# Altium PCB I-RING V1.0.pcbdoc
Units mil, origin at the board's own origin, x right, y up, seen from the top; angles counter-clockwise.
Board outline 1170.48 x 1480.27 mil, 2 copper layers (Top Layer, Bottom Layer); 42 components, 29 nets, 171 pads, 60 vias.
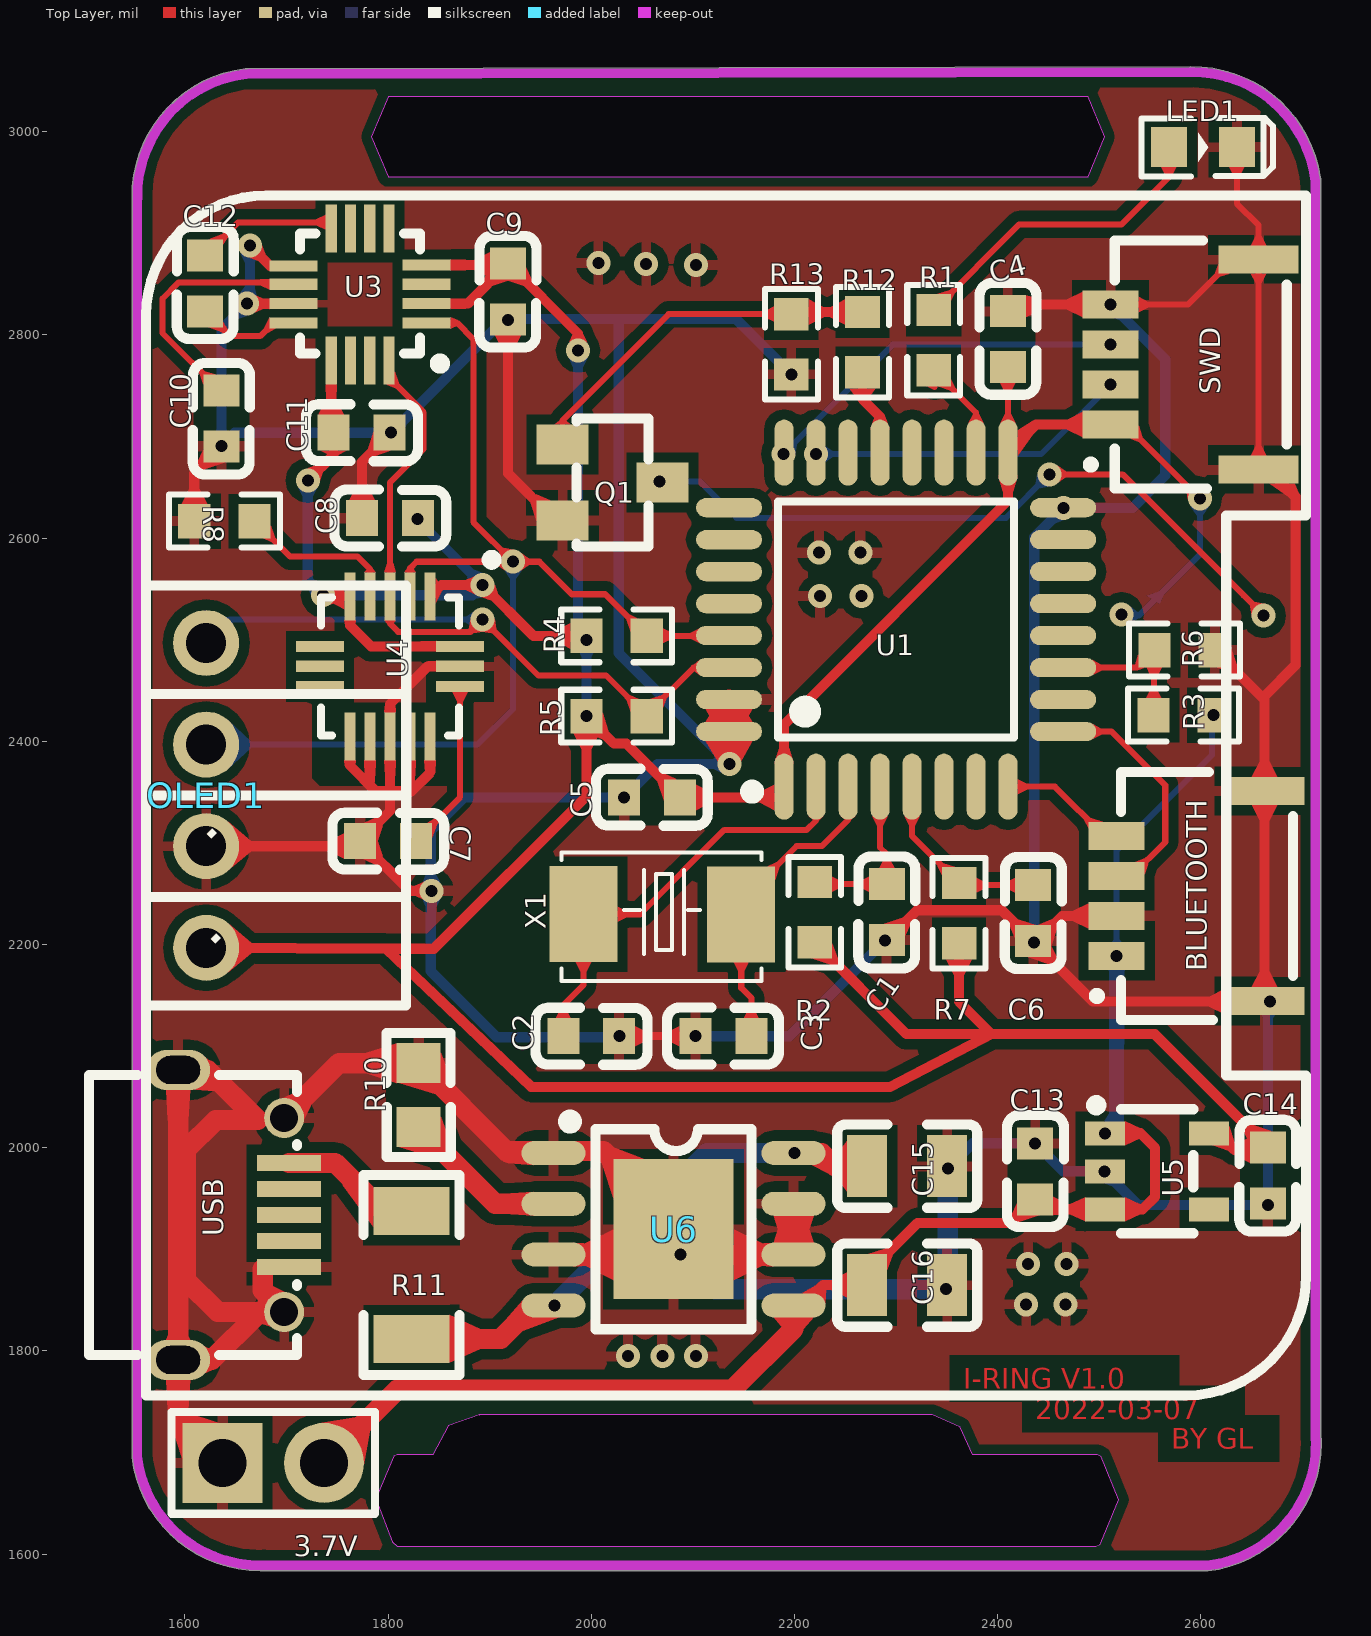
[diagram p0: Top Layer view]
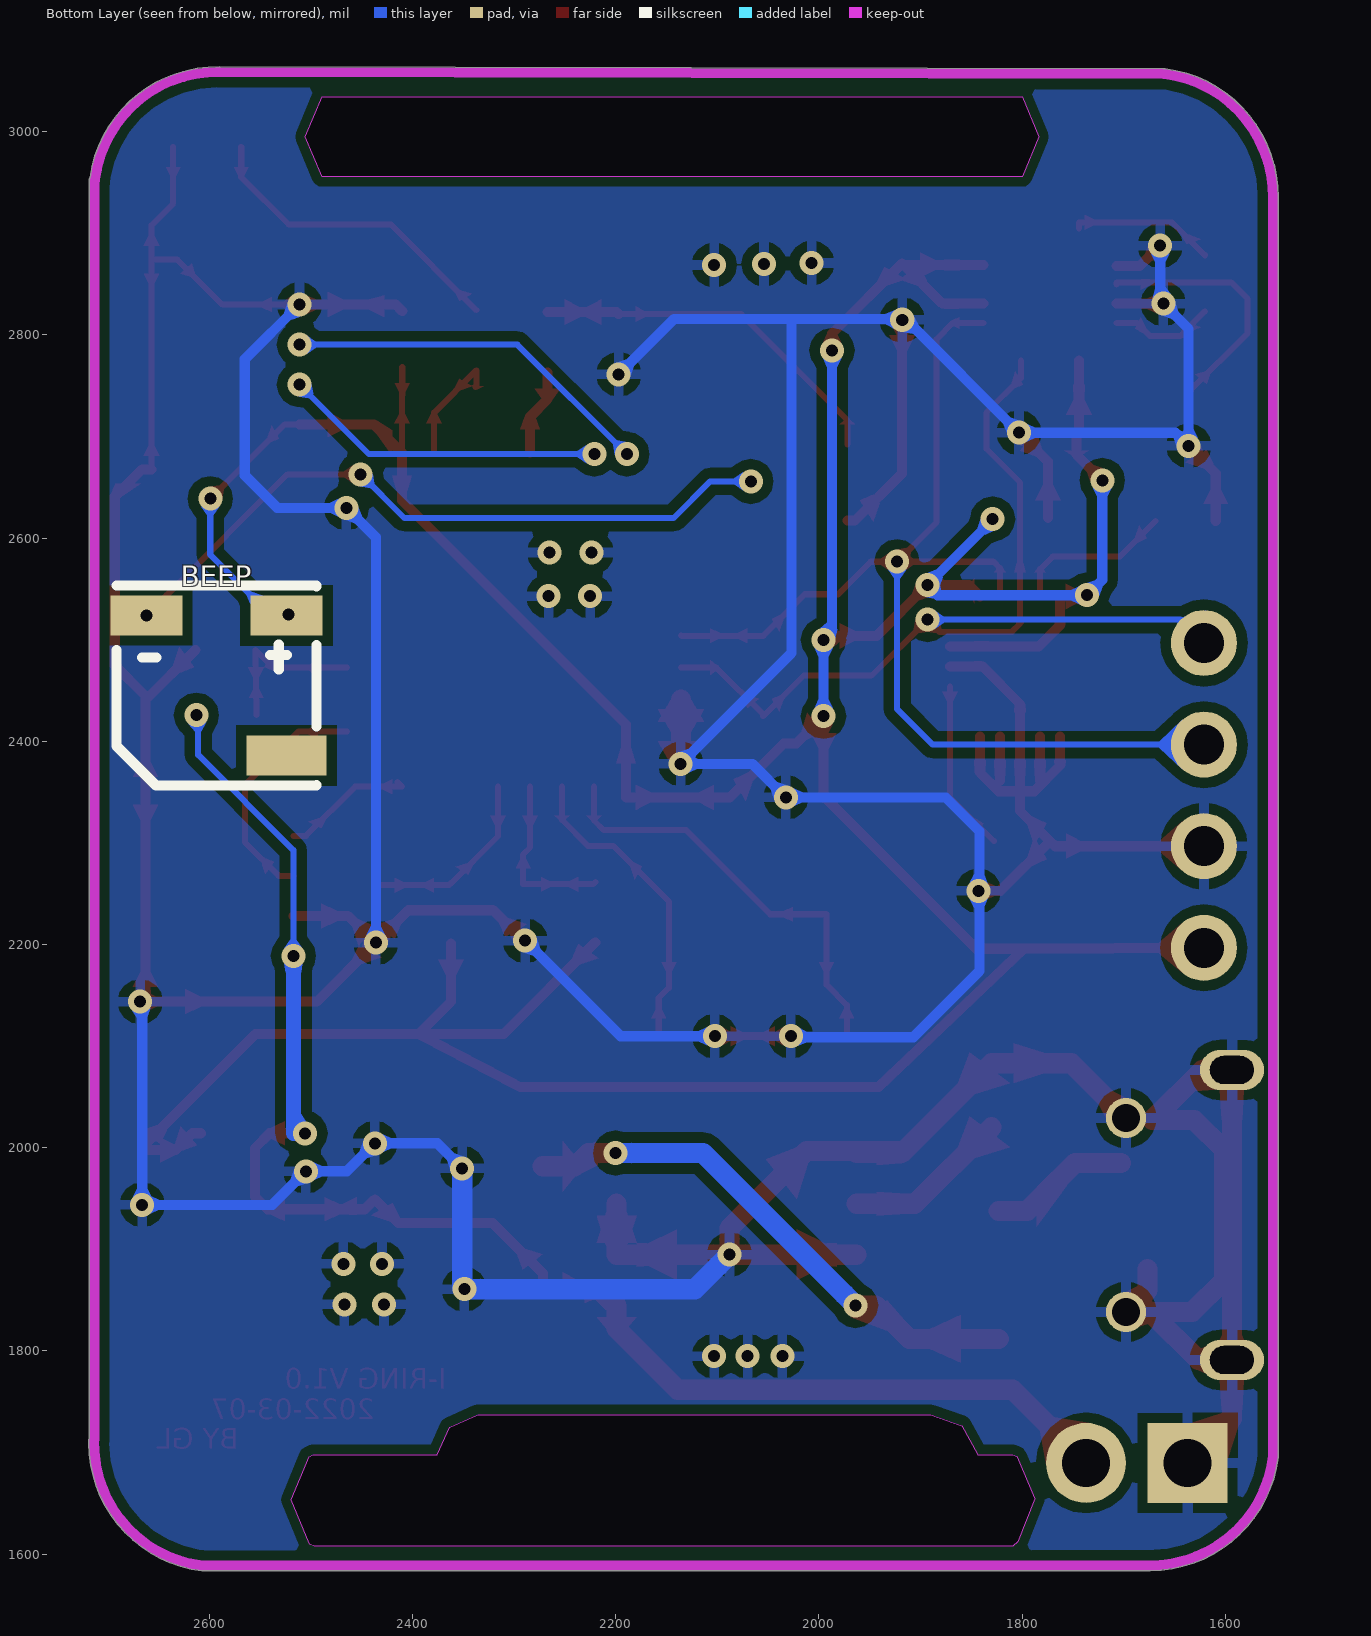
[diagram p1: Bottom Layer view, seen from below]

## Layer stack, top to bottom
Top Solder: solder mask 0.4, Solder Resist, Dk 3.5
Top Layer: signal copper 1.4
Dielectric1: dielectric 12.6, FR-4, Dk 4.8
Bottom Layer: signal copper 1.4
Bottom Solder: solder mask 0.4, Solder Resist, Dk 3.5

## Board outline
1548,1695.23 ccw(c1673.54,1710.36) 1674.02,1583.91 ccw(c1674.97,1588.83) 1674.97,1583.82 2606.52,1583.59 ccw(c2606.52,1588.6) 2606.52,1583.59 ccw(c2606.52,1588.6) 2607.12,1583.62 ccw(c2591.99,1709.17) 2718.44,1709.17 ccw(c2591.99,1709.17) 2718.39,1712.78 ccw(c2713.38,1712.64) 2717.99,1714.61 2717.99,2952.63 ccw(c2712.97,2952.63) 2717.33,2955.12 ccw(c2592.12,2937.42) 2590.16,3063.86 ccw(c2590.24,3058.85) 2590.02,3063.86 1661.2,3061.85 ccw(c1659.94,3056.99) 1659.34,3061.97 ccw(c1674.47,2936.43) 1548.02,2935.62 ccw(c1552.97,2934.83) 1547.96,2934.83 1547.96,1695.83 ccw(c1552.97,1695.83)
cut-out: 1804.03,1611.99 1808.97,1607.82 2496.69,1607.82 2500.81,1609.97 2501.49,1610.55 2519.27,1653.46 2501.76,1696.12 2497.95,1697.87 2375.53,1697.87 2363.12,1725.05 2335.84,1737.23 2335.1,1737.22 1889.98,1737.22 1890.05,1737.22 1859.32,1726.38 1843.72,1697.85 1808.97,1697.85 1805.43,1696.38 1787.66,1654.47
cut-out: 1799.97,2955.83 2488.95,2955.83 2505.26,2995.2 2488.95,3034.57 1799.97,3034.57 1783.67,2995.2

## Design rules (kind name [scope] priority, off if disabled: settings)
Clearance [All] p1: gap=10
PolygonConnect [All] p1: connectstyle=Relief reliefconductorwidth=10 reliefentries=4 polygonreliefangle="90 Angle" airgapwidth=10
RoutingVias [All] p1: holewidth=28 width=50 viastyle="Through Hole" minholewidth=28 minwidth=50 maxholewidth=28 maxwidth=50
SolderMaskExpansion [All] p1: expansion=4
Width [All] p1: maxlimit=10 minlimit=10 preferedwidth=10
30 further rules are at their usual default settings.

## Components (designator, comment, footprint, x,y, rotation, side; value= is the part's Value field where it differs from the comment)
3.7V "3.7V 400mAH" HDR-TH_2P-P2.54-V-M 1686.97,1689.83 r0 top
BEEP "FST-5020" BUZ-SMD_FST-5020 2592.97,2454.83 r180 bottom
BLUETOOTH "BLUETOOTH" CONN-SMD_SH1.0X4 2589.97,2247.84 r90 top
C1 "104" C0603 2290.97,2231.83 r90 top
C2 "20pF" C0603 1999.97,2109.83 r180 top
C3 "20pF" C0603 2129.97,2109.83 r0 top
C4 "104" C0603 2409.97,2795.83 r270 top
C5 "104" C0603 2059.97,2344.83 r0 top
C6 "104" C0603 2434.97,2230.83 r270 top
C7 "104" C0603 1799.97,2301.83 r180 top
C8 "104" C0603 1801.97,2619.83 r180 top
C9 "0.1u" C0603 1917.97,2842.83 r90 top
C10 "4.7uF" C0603 1635.97,2717.83 r90 top
C11 "104" C0603 1773.97,2703.83 r180 top
C12 "0.22uF" C0603 1619.97,2850.83 r270 top
C13 "104" C0603 2436.97,1976.83 r270 top
C14 "104" C0603 2665.97,1972.83 r90 top
C15 "10uF" C0805 2310.97,1981.83 r0 top
C16 "10uF" C0805 2310.97,1864.83 r0 top
LED1 "LED-0603_B" LED0603_BLUE 2601.97,2984.83 r0 top
OLED1 "0.96OLED_4P_MODULE_JX" 0.96OLED_4P 1620.97,2346.83 r90 top
Q1 "j3y" J3Y 2020.97,2654.83 r180 top
R1 "4.7K" R0603#1 2336.97,2794.83 r270 top
R2 "10K" R0603#1 2219.97,2231.83 r270 top
R3 "10K" R0603#1 2582.97,2425.83 r0 top
R4 "4.7K" R0603#1 2024.97,2503.83 r0 top
R5 "4.7K" R0603#1 2024.97,2424.83 r0 top
R6 "10K" R0603#1 2583.97,2489.83 r180 top
R7 "0" R0603#1 2361.97,2230.83 r270 top
R8 "4.7k" R0603#1 1638.97,2616.83 r180 top
R10 "4.7K" R0603#2 1829.97,2051.83 r270 top
R11 "0.25" R1206 1822.97,1874.83 r270 top
R12 "4.7k" R0603#1 2266.97,2792.83 r270 top
R13 "4.7k" R0603#1 2196.97,2790.83 r270 top
SWD "SWD" CONN-SMD_SH1.0X4 2583.97,2770.84 r90 top
U1 "STM32F030K6T6TR" LQFP-32_L7.0-W7.0-P0.80-LS9.0-TL 2299.97,2519.83 r90 top
U3 "C-HMC5883L" HMC 1770.97,2841.83 r180 top
U4 "ICM-20602" LGA-16_L3.0-W3.0-ICM20602 1801.97,2473.83 r180 top
U5 "RT9013-33GB" SOT-23-5_L3.0-W1.7-P0.95-LS2.8-BR 2556.99,1976.82 r180 top
U6 "TP4056X" SOP-8_L4.9-W3.9-P1.27-LS6.0-BL-EP 2080.97,1919.83 r270 top
USB "MICRO XNJ ZB" MICRO-USB-SMD_MICRO-XNJ-ZB 1647.97,1933.83 r90 top
X1 "8MHz" SMD-5032_2P 2069.97,2229.83 r0 top

## Footprints (in the part's own frame and the unit in brackets; to place one, negate y for a bottom-side part, rotate by r counter-clockwise, add the part's x,y. Pads: shape width x height; smd on the part's side, far side on the other; paste and mask are expansions set on the pad)
0.96OLED_4P [mm]
  round 1.65 hole 1: 1(-3.81,-0.001) 2(-1.27,0.002) 3(1.27,0.002) 4(3.81,0.002)
  silkscreen extent -15,-27.5 15,1.5
BUZ-SMD_FST-5020 [mm]
  rect 1.8x1 smd: 1(1.75,1.75) 2(-1.75,1.75)
  rect 2x1 smd: 3(1.75,-1.75)
  silkscreen extent -2.5,-2.5 2.5,2.5
C0603 [mm]
  rect 0.8x0.9 smd: 1(-0.7,0) 2(0.7,0)
  silkscreen extent -1.41,-0.71 1.39,0.72
C0805 [mm]
  rect 1x1.55 smd: 1(-1,0) 2(1,0)
  silkscreen extent -1.75,-1.04 1.75,1.04
CONN-SMD_SH1.0X4 [mm]
  rect 0.7x1.4 smd: 1(-1.5,1.85) 2(-0.5,1.85) 3(0.5,1.85) 4(1.5,1.85)
  rect 0.7x2 smd: 5(-2.625,-1.85) 6(2.625,-1.85)
  silkscreen extent -3.1,-2.55 3.1,2.42
HDR-TH_2P-P2.54-V-M [mm]
  rect 2x2 hole 1.2: 1(-1.27,0)
  round 2 hole 1.2: 2(1.27,0)
  silkscreen extent -2.54,-1.27 2.54,1.27
HMC [mm]
  rect 1.2x0.28 smd: 1(-1.702,0.762) 2(-1.702,0.279) 3(-1.702,-0.203) 4(-1.702,-0.686) 9(1.626,-0.66) 10(1.626,-0.203) 11(1.626,0.279) 12(1.626,0.762)
  rect 0.28x1.2 smd: 5(-0.762,-1.6) 6(-0.279,-1.6) 7(0.203,-1.6) 8(0.686,-1.6) 13(0.686,1.702) 14(0.203,1.702) 15(-0.279,1.702) 16(-0.762,1.702)
  silkscreen extent -2.16,-1.47 1.47,1.9
J3Y [mm]
  rect 1.3x1 smd: 1(1.25,-0.95) 2(1.25,0.95) 3(-1.25,0)
  silkscreen extent -0.9,-1.6 0.9,1.6
LED0603_BLUE [mm]
  rect 0.9x1 smd: 1(-0.85,0) 2(0.85,0)
  silkscreen extent -1.54,-0.73 1.75,0.73
LGA-16_L3.0-W3.0-ICM20602 [mm]
  rect 0.28x1.2 smd: 1(-1,-1.75) 2(-0.5,-1.75) 3(0,-1.75) 4(0.5,-1.75) 5(1,-1.75) 9(1,1.75) 10(0.5,1.75) 11(0,1.75) 12(-0.5,1.75) 13(-1,1.75)
  rect 1.2x0.28 smd: 6(1.75,-0.5) 7(1.75,0) 8(1.75,0.5) 14(-1.75,0.5) 15(-1.75,0) 16(-1.75,-0.5)
  silkscreen extent -2.66,-2.79 1.73,1.73
LQFP-32_L7.0-W7.0-P0.80-LS9.0-TL [mm]
  oval 1.65x0.48 smd: 1(-4.176,2.799) 2(-4.176,2) 3(-4.176,1.2) 4(-4.176,0.4) 5(-4.176,-0.4) 6(-4.176,-1.2) 7(-4.176,-2) 8(-4.176,-2.799) 17(4.176,-2.799) 18(4.176,-2) 19(4.176,-1.2) 20(4.176,-0.4) 21(4.176,0.4) 22(4.176,1.2) 23(4.176,2) 24(4.176,2.799)
  oval 0.48x1.65 smd: 9(-2.799,-4.176) 10(-2,-4.176) 11(-1.2,-4.176) 12(-0.4,-4.176) 13(0.4,-4.176) 14(1.2,-4.176) 15(2,-4.176) 16(2.799,-4.176) 25(2.799,4.176) 26(1.999,4.176) 27(1.199,4.176) 28(0.399,4.176) 29(-0.399,4.176) 30(-1.199,4.176) 31(-1.999,4.176) 32(-2.799,4.176)
  silkscreen extent -4.45,-2.95 2.95,3.75
MICRO-USB-SMD_MICRO-XNJ-ZB [mm]
  rect 0.4x1.6 smd: 1(1.3,-1.388) 2(0.65,-1.388) 3(0,-1.388) 4(-0.65,-1.388) 5(-1.3,-1.388)
  oval 1x1.6 hole 0.7 slot 1.1 at 90 deg: 6(-3.625,1.388) 6(3.625,1.388)
  round 1 hole 0.7: 6(-2.425,-1.262) 6(2.425,-1.262)
  silkscreen extent -3.5,-1.59 3.5,3.62
R0603#1 [mil]
  rect 31.75x34.02 smd: 1(-29.66,0) 2(29.65,0)
  silkscreen extent -55,-26 55,26
R0603#2 [mil]
  rect 39.37x43.31 smd: 1(-31.49,0) 2(31.49,0)
  silkscreen extent -61,-31 61,32
R1206 [mm]
  rect 1.2x1.9 smd: 1(-1.6,0) 2(1.6,0)
  silkscreen extent -2.5,-1.2 2.5,1.2
SMD-5032_2P [mm]
  rect 1.7x2.4 smd: 1(-1.971,0) 2(1.971,0)
  silkscreen extent -2.52,-1.67 2.48,1.55
SOP-8_L4.9-W3.9-P1.27-LS6.0-BL-EP [mm]
  oval 0.6x1.6 smd: 1(-1.905,-3) 2(-0.635,-3) 3(0.635,-3) 4(1.905,-3) 5(1.905,3) 6(0.635,3) 7(-0.635,3) 8(-1.905,3)
  rect 3.5x3 smd: 9(0,0)
  silkscreen extent -2.84,-2.74 2.5,1.95
SOT-23-5_L3.0-W1.7-P0.95-LS2.8-BR [mm]
  rect 1x0.6 smd: 1(1.3,-0.95) 2(1.3,0) 3(1.3,0.95) 4(-1.3,0.95) 5(-1.3,-0.95)
  silkscreen extent -0.9,-1.78 1.65,1.55

## Via types
v1: diameter 23.62, hole 11.81, Top Layer to Bottom Layer, 58 vias
v2: diameter 24, hole 12, Top Layer to Bottom Layer, 2 vias

## Nets (pads, with @x,y where several pads share a name; then routed paths per layer and width w, separated by ;. In a path a pad name is that pad's centre, name@x,y a point inside that pad or via, vN(x,y) a via of type N, cw(c..) or ccw(c..) an arc to the next point about the centre after c; other vN are vias at no path point)
+3.3V: BEEP.1 C4.2 C5.2 C8.1 C9.2 C11.2 C14.2 OLED1.1 R2.2 R4.1 R5.1 R7.2 SWD.1 U1.1 U1.17 U3.2 U3.4 U3.13 U4.1 U4.5 U4.16 U5.5 | length 4511.4
  Top Layer w6: C4.2@2409.97,2768.23 2409.97,2741.03 2410.17,2740.83 U1.17 ; SWD.1@2511.17,2711.83 2526.07,2711.83 v1(2598.97,2638.83)
  Top Layer w10: OLED1.1@1621.07,2196.83 1797.97,2195.83 ; v1(1720.97,2656.83) 1746.37,2682.23 C11.2 1743.97,2706.23 U3.13 ; v1(1735.97,2543.83) 1737.07,2542.73 U4.5 1762.57,2514.23 1783.27,2493.53 U4.16 ; U3.2 1878.37,2830.83 C9.2 ; U3.4 1916.37,2868.83 C9.2 ; U4.1@1841.37,2542.73 1852.47,2553.83 v1(1892.97,2553.83) 1942.97,2503.83 R4.1 ; v1(1986.97,2784.83) 1986.97,2801.43 C9.2 ; R2.2@2219.97,2202.13 2310.27,2111.83 2393.97,2111.83 ; R7.2@2361.97,2201.13 2361.97,2143.83 2393.97,2111.83 ; SWD.1@2511.17,2711.73 2437.67,2711.73 U1.17 2410.17,2637.03 2189.77,2416.63 U1.1 2189.77,2344.83 2087.57,2344.83 2034.57,2397.83 2022.27,2397.83 v1(1995.31,2424.83) 1995.27,2346.13 1844.97,2195.83 1797.97,2195.83 ; U5.5 2616.57,2014.23 2632.97,1997.83 2663.37,1997.83 C14.2 2554.57,2111.83 2393.97,2111.83 ; 1797.97,2195.83 1940.97,2059.83 2293.97,2059.83 2393.97,2111.83
  Bottom Layer w6: BEEP.1 2538.87,2523.73 2598.97,2583.83 v1(2598.97,2638.83)
  Bottom Layer w10: v1(1720.97,2656.83) 1720.97,2558.83 v1(1735.97,2543.83) ; v1(1735.97,2543.83) 1882.97,2543.83 v1(1892.97,2553.83) 1828.97,2617.83 v1(1828.97,2618.83) ; v1(1986.97,2784.83) 1986.97,2508.17 v1(1995.31,2499.83) v1(1995.31,2424.83)
  other v1: 2521.97,2524.83
+5V: R11.1 USB.1 | length 140
  Top Layer w20: USB.1 1747.77,1985.03 1794.97,1937.83 R11.1
ADC_IN: R3.1 R6.2 U1.11 | length 161
  Top Layer w6: U1.11 2537.07,2472.63 R6.2 R3.1@2553.37,2425.83
BEEP: R12.2 U1.21 | length 86
  Top Layer w10: R12.2@2266.97,2763.13 2266.97,2736.83 2284.17,2719.63 U1.21
C7_1: C7.1 U4.14 | length 170.2
  Top Layer w6: C7.1@1827.57,2301.83 1870.87,2345.13 U4.14
C10_2: C10.2 U3.10 | length 253
  Top Layer w6: C10.2 1634.37,2745.43 1577.97,2801.83 1577.97,2835.83 1593.97,2851.83 1706.97,2851.83 U3.10
C12_1: C12.1 U3.8 | length 143.4
  Top Layer w6: C12.1 1652.37,2910.83 1743.97,2910.83 U3.8
C12_2: C12.2 U3.12 | length 118.6
  Top Layer w6: C12.2@1631.37,2811.83 1619.97,2823.23 1644.37,2798.83 1673.97,2798.83 1686.97,2811.83 U3.12
FOSC1: C2.2 U1.2 X1.1 | length 428.7
  Top Layer w6: C2.2 1972.37,2140.23 1992.37,2160.23 X1.1 2047.97,2229.83 2130.97,2312.83 2211.97,2312.83 2221.27,2322.13 U1.2@2221.27,2355.43
FOSC2: C3.2 U1.3 X1.2 | length 308
  Top Layer w6: C3.2@2157.57,2109.83 2157.57,2147.43 2147.57,2157.33 X1.2 2147.57,2242.43 2201.97,2296.83 2226.97,2296.83 2252.77,2322.63 U1.3@2252.77,2355.43
GND: 3.7V.1 BLUETOOTH.2 BLUETOOTH.5 BLUETOOTH.6 C1.1 C2.1 C3.1 C4.1 C5.1 C6.2 C7.2 C8.2 C9.1 C10.1 C11.1 C13.1 C14.1 C15.2 C16.2 LED1.2 OLED1.2 Q1.2 R6.1 R8.2 R10.1 R13.2 SWD.4 SWD.5 SWD.6 U1.16 U1.31 U1.32 U3.9 U3.11 U4.9 U4.10 U4.11 U4.12 U4.13 U4.15 U5.2 U6.1 U6.3 U6.6 U6.7 U6.9 USB.5 USB.6 | length 8878.6
  Top Layer w6: v1(2511.17,2829.93) 2587.07,2829.93 2631.37,2874.23 SWD.6 ; LED1.2@2635.47,2984.83 2635.47,2929.33 2656.77,2908.03 SWD.6 ; SWD.5 SWD.6
  Top Layer w8: C2.1@2027.57,2109.83 v1(2102.41,2109.83)
  Top Layer w10: R8.2 1609.27,2663.63 C10.1@1635.97,2690.23 ; OLED1.2 1767.37,2296.83 C7.2 ; v1(1660.97,2830.83) U3.11 ; v1(1663.97,2887.83) 1683.97,2867.83 U3.9 ; U4.9 1762.57,2376.23 1787.97,2350.83 1822.97,2350.83 1841.37,2369.23 U4.13@1841.37,2404.93 ; C8.2 1774.37,2675.23 v1(1802.97,2703.83) ; 1782.27,2360.83 U4.10 ; 1821.67,2360.83 U4.12 ; v1(1842.97,2252.83) 1821.37,2252.83 C7.2 ; U4.15 1838.97,2473.83 1801.97,2436.83 U4.11 1801.97,2360.83 1801.97,2331.43 C7.2 ; C9.1@1917.97,2815.23 1917.97,2663.83 1964.37,2617.43 Q1.2 ; C1.1@2290.97,2204.23 2320.57,2233.83 2403.97,2233.83 v1(2435.97,2201.83) 2493.97,2143.83 v1(2667.97,2143.83) ; C4.1 2416.47,2829.93 v1(2511.17,2829.93) ; C6.2@2434.97,2203.23 2438.37,2203.23 2463.27,2228.13 BLUETOOTH.2@2517.17,2228.13 ; U1.16 2464.77,2630.03 v1(2464.97,2629.83) ; R6.1@2613.67,2489.83 2662.77,2440.63 ; SWD.5 2666.27,2667.53 2692.97,2640.83 2692.97,2474.83 2662.77,2444.63 2662.77,2440.63 ; BLUETOOTH.5 2662.77,2351.13 2662.77,2440.63
  Top Layer w20: 3.7V.1 1593.37,1733.43 USB.6@1593.37,1791.13 ; 1671.67,1836.33 1626.47,1791.13 USB.6@1593.37,1791.13 ; 1671.67,2027.33 1622.47,2076.53 1593.37,2076.53 1593.37,1815.13 USB.6@1593.37,1791.13 ; 1671.68,2027.3 1630.45,2027.3 1600.97,1997.83 1600.97,1869.83 1632.44,1838.36 1697.67,1838.36 1676.57,1859.43 USB.5@1676.57,1880.63 ; USB.6@1697.67,2029.33 1751.67,2083.33 R10.1 1918.47,1994.83 U6.1 ; 1918.87,1996.83 2011.97,1996.83 2087.97,1920.83 v1(2087.97,1894.83) ; U6.3 v1(2087.97,1894.83) ; U1.31 U1.32 v1(2135.97,2377.83) ; U6.7 U6.6 v1(2087.97,1894.83)
  Bottom Layer w10: v1(1663.97,2887.83) 1663.97,2833.83 v1(1660.97,2830.83) 1635.98,2805.83 v1(1635.97,2690.83) 1648.98,2703.83 v1(1802.97,2703.83) 1913.97,2814.83 v2(1917.97,2814.83) ; v2(1917.97,2814.83) 1918.97,2815.83 2027.97,2815.83 ; v1(2027.53,2109.83) 2026.53,2108.83 1906.98,2108.83 1841.98,2173.83 1841.98,2311.83 1874.97,2344.83 v1(2032.41,2344.83) 2065.41,2377.83 v1(2135.97,2377.83) 2026.97,2486.83 2026.97,2815.83 2027.97,2815.83 ; v1(2102.41,2109.83) 2194.97,2109.83 v1(2288.97,2203.83) ; v1(2196.97,2761.17) 2142.31,2815.83 2027.97,2815.83 ; v1(2350.97,1979.83) 2375.53,2004.39 v1(2436.97,2004.39) 2464.53,1976.83 v1(2504.97,1976.83) 2537.97,1943.83 v1(2665.97,1943.83) ; 2435.97,2250.83 v1(2435.97,2201.83) 2435.97,2600.83 v1(2464.97,2629.83) ; v1(2464.97,2629.83) 2532.97,2629.83 2564.97,2661.83 2564.97,2776.13 v1(2511.17,2829.93) ; v1(2665.97,1943.83) 2665.98,2141.83 v1(2667.97,2143.83)
  Bottom Layer w20: v1(2087.97,1894.83) 2121.97,1860.83 v1(2348.97,1860.83) 2350.98,1862.83 v1(2350.97,1979.83)
  other v1: 2035.97,1794.83 2069.97,1794.83 2102.97,1794.83 2427.97,1845.83 2466.97,1845.83 2429.97,1885.83 2467.97,1885.83 2224.97,2542.83 2265.97,2542.83 2223.97,2585.83 2264.97,2585.83 2102.97,2868.83 2053.97,2869.83 2006.97,2870.83
  other v2: 1917.97,2814.83
LED: R1.2 U1.18 | length 114.9
  Top Layer w6: 2337.97,2748.83 2336.97,2749.83 2336.97,2765.13 2378.67,2723.43 U1.18
LED1_1: LED1.1 R1.1 | length 315.2
  Top Layer w6: R1.1 2421.27,2908.83 2521.97,2908.83 2568.47,2955.33 LED1.1
NRST: C1.2 R2.1 U1.4 | length 170.7
  Top Layer w6: R2.1 2222.07,2259.43 C1.2 2290.97,2288.83 2284.17,2295.53 U1.4
NULL: 
Q1_1: Q1.1 R12.1 R13.1 | length 363.1
  Top Layer w6: Q1.1 1971.77,2715.93 2076.27,2820.53 R13.1
  Top Layer w10: R13.1 2198.97,2822.53 R12.1
Q1_3: BEEP.2 Q1.3 | length 698
  Top Layer w6: v1(2450.97,2662.83) 2522.97,2662.83 2641.97,2543.83 v1(2661.87,2523.73) 2655.77,2529.83 2652.97,2532.83
  Bottom Layer w6: v1(2066.97,2655.83) 2106.97,2655.83 2142.97,2619.83 2407.97,2619.83 v1(2450.97,2662.83)
RXD: BLUETOOTH.3 U1.9 | length 269.9
  Top Layer w6: U1.9@2494.17,2409.63 U1.9 2512.17,2409.63 2564.97,2356.83 2564.97,2300.83 2531.67,2267.53 BLUETOOTH.3@2517.17,2267.53
S$20193: 
SCL: OLED1.3 R4.2 U1.29 U3.1 U4.2 | length 1124
  Top Layer w6: U4.2 1821.67,2570.53 1827.97,2576.83 v1(1922.97,2576.83) ; U3.1 1867.97,2811.83 1883.97,2795.83 1883.97,2615.83 v1(1922.97,2576.83) ; U1.29 2135.27,2503.83 2054.67,2503.83 2013.67,2544.83 1980.97,2544.83 1948.97,2576.83 v1(1922.97,2576.83)
  Bottom Layer w6: OLED1.3 1887.97,2396.83 1922.97,2431.83 v1(1922.97,2576.83)
SDA: OLED1.4 R5.2 U1.30 U3.16 U4.3 | length 970.4
  Top Layer w6: U3.16 1800.97,2757.83 1834.97,2723.83 1834.97,2687.83 1801.97,2654.83 U4.3 1801.97,2515.83 1809.97,2507.83 1880.97,2507.83 v1(1892.97,2519.83) 1947.97,2464.83 2014.67,2464.83 2054.67,2424.83 2054.67,2426.53 2100.77,2472.63 U1.30
  Bottom Layer w6: OLED1.4 1643.92,2519.83 v1(1892.97,2519.83)
SWCLK: SWD.3 U1.24 | length 366.8
  Bottom Layer w6: v1(2188.97,2682.83) 2296.67,2790.53 v1(2511.14,2790.52)
SWDIO: SWD.2 U1.23 | length 318.5
  Bottom Layer w6: v1(2220.97,2682.83) 2442.81,2682.83 v1(2511.14,2751.15)
TXD: BLUETOOTH.4 U1.8 | length 133.3
  Top Layer w6: U1.8 2456.37,2355.43 2504.87,2306.93 BLUETOOTH.4@2517.17,2306.93 ; U1.8 U1.8@2414.58,2359.83
U1_5: C6.1 R7.1 U1.5 | length 187.9
  Top Layer w6: U1.5@2315.77,2355.43 2315.77,2306.73 R7.1 2364.07,2258.43 C6.1
U4_4: R8.1 U4.4 | length 160
  Top Layer w6: R8.1@1668.67,2616.83 1703.67,2581.83 1769.97,2581.83 1782.27,2569.53 U4.4
U6_2: R10.2 U6.2 | length 164.2
  Top Layer w20: R10.2 1905.47,1944.83 U6.2
U6_4: C15.1 R11.2 U6.4 U6.8 | length 528.7
  Top Layer w20: R11.2 1910.97,1811.83 1943.97,1844.83 U6.4 ; v1(2199.97,1994.83) 2226.97,1994.83 2239.97,1981.83 C15.1
  Bottom Layer w20: v1(1963.97,1844.83) 2113.97,1994.83 v1(2199.97,1994.83)
VBAT: 3.7V.2 BLUETOOTH.1 C13.2 C16.1 R3.2 U5.1 U5.3 U6.5 | length 1520.8
  Top Layer w10: U6.5 2207.97,1844.83 2227.97,1864.83 C16.1 2271.57,1876.43 2320.97,1925.83 2413.57,1925.83 2436.97,1949.23 2446.77,1939.43 U5.3 2542.57,1939.43 2554.97,1951.83 2554.97,1999.83 2540.57,2014.23 v1(2505.77,2014.23)
  Top Layer w20: 3.7V.2 1808.97,1761.83 2138.97,1761.83 2199.07,1821.93 U6.5
  Bottom Layer w6: v1(2517.14,2188.77) 2517.14,2292.99 2610.97,2386.83 2610.97,2419.83 v1@2615.97,2424.83
  Bottom Layer w15: v1(2505.77,2014.23) 2516.97,2014.23 v1(2517.14,2188.77)
  other v1: 2612.63,2425.83
pads on no net: BEEP.3 U1.6 U1.7 U1.10 U1.12 U1.13 U1.14 U1.15 U1.19 U1.20 U1.22 U1.25 U1.26 U1.27 U1.28 U3.3 U3.5 U3.6 U3.7 U3.14 U3.15 U4.6 U4.7 U4.8 U5.4 USB.2 USB.3 USB.4

## Polygon pours and split planes (outlines as drawn)
GND on Top Layer "Top Layer-No Net" (solid, remove dead copper, pour order 0): 1226.82,3099.74 1206.82,3079.74 1206.82,1559.74 2936.82,1559.74 3116.82,1379.74 3171.82,1434.74 3171.82,3109.74
GND on Bottom Layer "Top Layer-No Net" (solid, remove dead copper, pour order 2): 1110,3240 1110,1550 1090,1530 1150,1470 3035,1470 3035,3215 3015,3235

## Keep-outs
Keep-Out Layer:
  lines w10: 1552.97,1695.83 ccw(c1673.54,1710.36) 1675.42,1588.93 ; 1553.05,2934.54 cw(c1674.47,2936.43) 1659.94,3056.99 ; 2590.24,3058.85 cw(c2592.12,2937.42) 2712.69,2951.95 ; 2606.52,1588.6 ccw(c2591.99,1709.17) 2713.38,1712.64

## Other copper
Top Layer:
  pour cut-out: 1723.97,2436.83 1724.97,2435.83 1724.97,2363.83 1732.97,2355.83 1875.97,2355.83 1878.97,2358.83 1878.97,2436.83
  region net GND: 1642.41,2272.47 1642.41,2321.19 1665.14,2301.83 1665.14,2291.83
  region net +3.3V: 1642.65,2221.07 1642.37,2172.35 1665.22,2191.58 1665.27,2201.58
  region net GND: 1696.44,2048.95 1717.32,2028.07 1723.7,2041.18 1709.55,2055.32
  region net GND: 1684.65,1823.6 1684.65,1853.12 1670.88,1848.36 1670.88,1828.36
  region net GND: 1678.03,1837.13 1698.91,1858.01 1685.8,1864.38 1671.65,1850.24
  region net VBAT: 1734.51,1729.12 1776.26,1687.36 1781.94,1720.66 1767.8,1734.8
  region net SCL: 1930.79,2567.97 1930.79,2585.69 1939.05,2579.83 1939.05,2573.83
  region net SCL: 1915.16,2567.97 1915.16,2585.69 1906.89,2579.83 1906.89,2573.83
  region net SCL: 1923.71,2588.62 1911.19,2576.09 1909.48,2586.08 1913.72,2590.32
  region net SDA: 1904.76,2520.57 1892.23,2508.04 1902.22,2506.34 1906.46,2510.58
  region net SDA: 1893.71,2508.04 1881.19,2520.57 1879.48,2510.58 1883.73,2506.34
  region net U6_4: 1956.16,1835.97 1956.16,1853.69 1947.89,1854.83 1947.89,1834.83
  region net U6_4: 2207.79,1985.97 2207.79,2003.69 2216.05,2004.83 2216.05,1984.83
  region net VBAT: 2513.59,2005.37 2513.59,2023.09 2521.86,2019.23 2521.86,2009.23
  region net +3.3V: 1989.95,2510.35 1985.54,2493.19 1978.45,2498.83 1981.02,2508.83
  region net +3.3V: 2007.1,2425.55 1994.55,2413.04 2003.12,2409.91 2010.2,2416.97
  region net +3.3V: 2004.15,2417 1986.43,2417.04 1990.27,2408.76 2000.27,2408.74
  region net +3.3V: 1978.11,2792.64 1995.83,2792.64 1991.97,2800.91 1981.97,2800.91
  region net GND: 1668.79,2821.97 1668.79,2839.69 1677.06,2835.83 1677.06,2825.83
  region net GND: 1637.01,2679.06 1624.17,2691.28 1621.27,2682.63 1628.51,2675.73
  region net GND: 1803.71,2692.04 1791.19,2704.57 1788.07,2696 1795.14,2688.92
  region net GND: 1908.97,2806.89 1926.97,2806.89 1922.97,2798.49 1912.97,2798.49
  region net GND: 1908.97,2806.89 1926.97,2806.89 1922.97,2798.49 1912.97,2798.49
  region net GND: 2673.85,2154.07 2657.07,2148.38 2657.81,2157.36 2667.81,2160.75
  region net GND: 2660.16,2134.97 2660.16,2152.69 2651.89,2148.83 2651.89,2138.83
  region net GND: 2447.72,2200.57 2435.75,2213.64 2444.45,2216.38 2451.21,2209
  region net GND: 2436.72,2213.62 2424.19,2201.09 2421.07,2209.66 2428.14,2216.73
  region net GND: 2447.76,2202.57 2435.24,2190.04 2443.81,2186.92 2450.88,2193.99
  region net GND: 2300.68,2202.28 2289.05,2215.64 2297.81,2218.17 2304.39,2210.61
  region net GND: 2144.74,2385.75 2127.02,2385.53 2125.77,2393.78 2145.77,2394.03
  region net GND: 2094.6,2100.97 2094.6,2118.69 2086.34,2113.83 2086.34,2105.83
  region net GND: 2035.35,2100.97 2035.35,2118.69 2043.61,2113.83 2043.61,2105.83
  region net +3.3V: 1885.16,2544.97 1885.16,2562.69 1876.89,2558.83 1876.89,2548.83
  region net +3.3V: 1904.76,2554.57 1892.23,2542.04 1900.81,2538.93 1907.88,2546
  region net GND: 1835.16,2243.97 1835.16,2261.69 1826.89,2257.83 1826.89,2247.83
  region net +3.3V: 1744.38,2552.13 1743.16,2534.46 1751.68,2537.73 1752.36,2547.73
  region net GND: 1675.76,2888.57 1663.23,2876.04 1671.81,2872.92 1678.88,2880
  region net +3.3V: 1732.76,2656.09 1720.24,2668.62 1728.81,2671.74 1735.88,2664.66
  region net GND: 2503.36,2821.07 2503.36,2838.79 2495.1,2834.93 2495.1,2824.93
  region net GND: 2519.01,2838.77 2518.97,2821.05 2527.25,2826.9 2527.26,2832.9
  region net GND: 2079.11,1902.64 2096.83,1902.64 2097.97,1910.91 2077.97,1910.91
  region net GND: 2080.16,1885.97 2080.16,1903.69 2071.89,1904.83 2071.89,1884.83
  region net GND: 2095.79,1885.97 2095.79,1903.69 2104.05,1904.83 2104.05,1884.83
  region net Q1_3: 2458.79,2653.97 2458.79,2671.69 2467.06,2665.83 2467.06,2659.83
  region net Q1_3: 2662.74,2535.51 2650.08,2523.12 2650.83,2530.73 2655.12,2534.93
  region net Q1_3: 2662.67,2535.51 2650.08,2523.05 2648.43,2533.05 2652.69,2537.27
  region net +3.3V: 2599.71,2650.62 2587.19,2638.09 2585.48,2648.08 2589.73,2652.32
  region net LED: 2338.44,2749.3 2335.85,2746.71 2330,2749.3
  region net LED: 2338.44,2749.3 2340.09,2750.95 2345,2749.3
  region net LED: 2353.98,2756.79 2340.99,2749.3 2352.41,2745.49 2357.79,2748.59
  region net LED1_1: 2340.92,2840.36 2353.98,2832.98 2357.83,2841.15 2352.41,2844.21
  region net +3.3V: 1846.85,2560.74 1846.85,2535.74 1852.44,2546.76 1848.91,2557.37
  region net SCL: 1816.14,2566.35 1827.16,2566.35 1824.65,2570.51 1818.65,2570.51
  region net SDA: 1796.46,2566.35 1807.48,2566.35 1804.97,2575.35 1798.97,2575.35
  region net SDA: 1807.48,2519.11 1796.46,2519.11 1798.97,2515.83 1804.97,2515.83
  region net U4_4: 1776.77,2566.35 1787.79,2566.35 1785.27,2569.53 1779.27,2569.53
  region net +3.3V: 1757.09,2530.23 1757.09,2555.23 1742.09,2547.73 1742.09,2537.73
  region net +3.3V: 1768.11,2519.11 1757.09,2519.11 1757.6,2514.2 1767.6,2514.2
  region net GND: 1768.11,2381.31 1757.09,2381.31 1757.57,2376.23 1767.57,2376.23
  region net GND: 1787.79,2381.31 1776.77,2381.31 1777.28,2366.31 1787.28,2366.31
  region net GND: 1796.46,2428.56 1807.48,2428.56 1806.97,2436.83 1796.97,2436.83
  region net GND: 1807.48,2381.31 1796.46,2381.31 1796.97,2366.31 1806.97,2366.31
  region net GND: 1827.16,2381.31 1816.14,2381.31 1816.65,2366.31 1826.65,2366.31
  region net GND: 1846.85,2381.31 1835.83,2381.31 1836.38,2369.23 1846.38,2369.23
  region net C7_1: 1878.37,2448.63 1863.37,2448.63 1867.87,2439.63 1873.87,2439.63
  region net GND: 1847.25,2468.32 1847.25,2479.35 1838.97,2478.83 1838.97,2468.83
  region net +3.3V: 1847.25,2488 1847.25,2499.02 1832.25,2498.51 1832.25,2488.51
  region net +3.3V: 2417.47,2752.52 2402.47,2752.52 2406.97,2743.52 2412.97,2743.52
  region net GND: 2427.69,2839.14 2427.69,2817.43 2442.69,2824.93 2442.69,2834.93
  region net GND: 1775.75,2319.55 1788.16,2297.85 1794.53,2316.92 1789.39,2325.92
  region net GND: 1788.16,2305.88 1775.87,2284.11 1789.48,2277.7 1794.58,2286.74
  region net GND: 1756.67,2284.33 1756.67,2309.33 1741.67,2301.83 1741.67,2291.83
  region net C7_1: 1838.13,2319.55 1843.28,2305.46 1848.19,2318.24 1845.92,2324.45
  region net Q1_1: 1964.27,2711.91 1979.27,2711.91 1974.77,2715.93 1968.77,2715.93
  region net GND: 1946.18,2616.17 1959.83,2637.11 1945.81,2643.07 1940.23,2634.51
  region net GND: 1596.82,2633.84 1621.82,2633.84 1614.32,2648.84 1604.32,2648.84
  region net U4_4: 1684.51,2612.88 1677.12,2599.82 1685.29,2595.98 1688.35,2601.4
  region net BEEP: 2279.47,2747.3 2254.47,2747.3 2261.97,2736.83 2271.97,2736.83
  region net Q1_1: 2249.97,2834.99 2249.97,2809.99 2234.97,2817.49 2234.97,2827.49
  region net Q1_1: 2213.98,2809.99 2213.98,2834.99 2228.98,2827.49 2228.98,2817.49
  region net Q1_1: 2179.97,2828.03 2179.97,2813.03 2170.97,2817.53 2170.97,2823.53
  region net +3.3V: 1922.04,2854.64 1900.26,2866.92 1893.84,2853.32 1902.88,2848.22
  region net +3.3V: 1900.26,2856.33 1900.26,2881.33 1885.26,2873.83 1885.26,2863.83
  region net +3.3V: 1935.69,2866.92 1913.92,2854.64 1933.07,2848.22 1942.11,2853.32
  region net GND: 1930.47,2799.52 1905.47,2799.52 1912.97,2784.52 1922.97,2784.52
  region net C10_2: 1618.26,2751.6 1629.83,2761.14 1619.64,2764.4 1614.99,2760.57
  region net GND: 1640.03,2674.52 1618.26,2686.8 1611.84,2673.2 1620.88,2668.1
  region net +3.3V: 1731.47,2721.55 1756.47,2721.55 1748.97,2736.55 1738.97,2736.55
  region net +3.3V: 1758.92,2686.11 1733.92,2686.11 1741.42,2682.27 1751.42,2682.27
  region net GND: 1802.1,2686.11 1785.79,2705.06 1780.4,2688.33 1786.94,2680.73
  region net C12_2: 1637.69,2812.58 1623.57,2807.52 1636.41,2802.56 1642.66,2804.79
  region net C12_1: 1623.56,2894.14 1637.69,2889.09 1642.66,2896.88 1636.41,2899.11
  region net VBAT: 2441.09,1933.52 2419.26,1945.7 2412.8,1932.12 2421.88,1927.06
  region net VBAT: 2454.69,1951.93 2454.69,1933.52 2469.69,1934.43 2469.69,1944.43
  region net +3.3V: 2648.26,2003.86 2670.03,2016.14 2650.88,2022.56 2641.84,2017.46
  region net +3.3V: 2648.26,1985.33 2648.26,2010.33 2633.26,2002.83 2633.26,1992.83
  region net U6_4: 2251.92,1956.83 2251.92,2006.83 2239.97,1991.83 2239.97,1971.83
  region net VBAT: 2271.73,1895.34 2291.29,1879.78 2296.78,1894.57 2288.91,1900.84
  region net VBAT: 2251.92,1852.33 2251.92,1877.33 2236.92,1869.83 2236.92,1859.83
  region net U6_2: 1851.63,2030.78 1811.73,2000.64 1846.7,1989.46 1862.81,2001.63
  region net GND: 1808.32,2063.64 1808.32,2103.01 1778.32,2093.32 1778.32,2073.32
  region net GND: 1851.63,2093.77 1811.73,2063.64 1846.7,2052.45 1862.81,2064.62
  region net U6_4: 1860.38,1835.46 1860.38,1788.21 1890.38,1801.83 1890.38,1821.83
  region net +5V: 1785.57,1922.23 1785.57,1961.45 1755.57,1991.38 1755.57,1963.09
  region net +3.3V: 1749.49,2751.21 1738.47,2751.21 1738.97,2736.21 1748.97,2736.21
  region net SDA: 1806.49,2764.15 1798.91,2751.21 1807.13,2747.44 1810.26,2752.79
  region net SCL: 1861.6,2817.34 1861.6,2806.32 1867.97,2808.83 1867.97,2814.83
  region net +3.3V: 1861.6,2836.35 1861.6,2825.32 1876.6,2825.83 1876.6,2835.83
  region net +3.3V: 1861.6,2874.35 1861.6,2863.32 1876.6,2863.83 1876.6,2873.83
  region net C12_1: 1738.47,2903.33 1738.47,2918.33 1729.47,2913.83 1729.47,2907.83
  region net C12_2: 1688.74,2806.32 1683.35,2817.34 1678.23,2807.33 1681.01,2801.63
  region net GND: 1683.35,2825.32 1683.35,2836.35 1668.35,2835.83 1668.35,2825.83
  region net C10_2: 1683.35,2844.33 1683.35,2855.34 1674.35,2854.83 1674.35,2848.83
  region net +3.3V: 2627.86,2021.37 2611.57,2002.41 2626.72,1997.02 2633.25,2004.63
  region net VBAT: 2525.49,1951.23 2525.49,1927.61 2540.49,1934.43 2540.49,1944.43
  region net VBAT: 2486.12,1927.61 2486.12,1951.23 2471.12,1944.43 2471.12,1934.43
  region net VBAT: 2525.49,2026.03 2525.49,2002.41 2540.49,2009.23 2540.49,2019.23
  region net GND: 2021.92,1949.11 2052.42,1988.73 2023.11,1999.84 2010.81,1983.85
  region net GND: 2021.92,1869.83 2021.92,1919.83 1991.92,1904.83 1991.92,1884.83
  region net GND: 2140.03,1919.83 2140.03,1869.83 2170.03,1884.83 2170.03,1904.83
  region net NRST: 2283.48,2275.14 2298.48,2275.14 2293.98,2284.14 2287.98,2284.14
  region net NRST: 2273.26,2251.89 2273.26,2266.89 2264.26,2262.39 2264.26,2256.39
  region net GND: 2286.92,2220.02 2308.69,2207.72 2315.1,2221.33 2306.07,2226.43
  region net FOSC1: 1964.92,2127.55 1979.92,2127.55 1975.42,2136.55 1969.42,2136.55
  region net GND: 2043.28,2119.83 2043.28,2099.83 2055.28,2105.83 2055.28,2113.83
  region net FOSC2: 2150.07,2127.55 2165.07,2127.55 2160.57,2136.55 2154.57,2136.55
  region net GND: 2086.67,2099.83 2086.67,2119.83 2074.67,2113.83 2074.67,2105.83
  region net SCL: 2070.51,2511.33 2070.51,2496.33 2079.51,2500.83 2079.51,2506.83
  region net SCL: 2038.75,2507.93 2046.39,2520.84 2038.16,2524.59 2035,2519.26
  region net +3.3V: 1979.44,2516.33 1979.44,2491.33 1964.44,2498.83 1964.44,2508.83
  region net SDA: 2058.68,2441.84 2070.51,2432.61 2073.83,2441.44 2069.06,2445.16
  region net SDA: 2038.75,2428.92 2046.38,2441.84 2038.15,2445.59 2035,2440.26
  region net +3.3V: 2011.2,2427.98 1996.4,2407.82 2010.86,2402.17 2016.85,2410.33
  region net +3.3V: 1982.77,2407.82 2007.77,2407.82 2000.27,2392.82 1990.27,2392.82
  region net FOSC1: 1999.89,2182.6 1984.89,2182.6 1989.39,2173.6 1995.39,2173.6
  region net FOSC1: 2025.84,2237.33 2025.84,2222.33 2034.84,2226.83 2034.84,2232.83
  region net FOSC2: 2173.65,2277.06 2181.02,2264 2184.88,2275.49 2181.82,2280.91
  region net FOSC2: 2155.07,2182.58 2140.07,2182.58 2144.57,2173.58 2150.57,2173.58
  region net +3.3V: 2103.28,2357.33 2103.28,2332.33 2118.28,2339.83 2118.28,2349.83
  region net +3.3V: 2071.79,2340.84 2084.18,2362.55 2070.55,2368.92 2065.41,2359.92
  region net GND: 2438.99,2219.02 2452.69,2198.11 2458.63,2216.41 2453.03,2224.96
  region net GND: 2417.26,2205.48 2438.27,2219.02 2419.87,2225.01 2411.27,2219.47
  region net GND: 2452.69,2198.56 2430.26,2187.52 2450.14,2180.59 2459.62,2185.25
  region net U1_5: 2417.26,2250.89 2417.26,2265.89 2408.26,2261.39 2408.26,2255.39
  region net GND: 1761.91,2637.55 1786.91,2637.55 1779.41,2652.55 1769.41,2652.55
  region net GND: 2642.93,2965.14 2627.93,2965.14 2632.43,2956.14 2638.43,2956.14
  region net LED1_1: 2575.98,2965.14 2560.98,2965.14 2565.48,2956.14 2571.48,2956.14
  region net +3.3V: 2236.98,2200.95 2216.73,2186.3 2234.46,2180.61 2242.67,2186.55
  region net NRST: 2236.98,2251.89 2236.98,2266.89 2245.98,2262.39 2245.98,2256.39
  region net ADC_IN: 2561.11,2442.84 2546.11,2442.84 2550.74,2451.84 2556.74,2451.84
  region net ADC_IN: 2545.97,2472.82 2538.44,2485.8 2535.53,2475.28 2539.21,2470.47
  region net ADC_IN: 2561.53,2472.82 2546.53,2472.82 2550.91,2463.82 2556.91,2463.82
  region net GND: 2629.51,2493.11 2614.89,2472.82 2629.27,2467.12 2635.2,2475.34
  region net +3.3V: 2374.47,2185.3 2349.47,2185.3 2356.97,2170.3 2366.97,2170.3
  region net U1_5: 2344.97,2268.86 2357.96,2276.36 2346.54,2280.16 2341.16,2277.06
  region net U1_5: 2378.98,2250.89 2378.98,2265.89 2387.98,2261.39 2387.98,2255.39
  region net GND: 1597.6,1693.85 1632.96,1729.2 1601.14,1739.81 1587,1725.67
  region net GND: 2489.58,2215.65 2489.58,2240.65 2474.58,2233.15 2474.58,2223.15
  region net RXD: 2536.09,2281.3 2544.7,2269.01 2548.15,2279.77 2544.66,2284.76
  region net TXD: 2489.58,2314.37 2503.19,2320.67 2491.07,2324.98 2485.27,2322.29
  region net GND: 2650.31,2158.27 2675.31,2158.27 2667.81,2173.27 2657.81,2173.27
  region net GND: 2623.44,2131.33 2623.44,2156.33 2608.44,2148.83 2608.44,2138.83
  region net GND: 2650.27,2364.96 2675.27,2364.96 2667.77,2379.96 2657.77,2379.96
  region net GND: 2675.31,2337.4 2650.31,2337.4 2657.81,2322.4 2667.81,2322.4
  region net +3.3V: 2538.7,2710.94 2531.11,2698 2539.33,2694.23 2542.47,2699.58
  region net +3.3V: 2483.58,2699.28 2483.58,2724.28 2468.58,2716.78 2468.58,2706.78
  region net GND: 2483.58,2817.43 2483.58,2842.43 2468.58,2834.93 2468.58,2824.93
  region net GND: 2538.7,2837.4 2538.7,2822.4 2547.7,2826.9 2547.7,2832.9
  region net GND: 2692.59,2653.71 2667.59,2653.71 2685.9,2640.83 2696.51,2644.37
  region net GND: 2649.31,2681.27 2664.31,2681.27 2659.81,2690.27 2653.81,2690.27
  region net GND: 2628.31,2860.4 2617.44,2870.73 2614.25,2861.35 2618.6,2857.21
  region net GND: 2664.31,2860.4 2649.31,2860.4 2653.81,2851.4 2659.81,2851.4
  region net GND: 2649.31,2887.96 2664.31,2887.96 2659.81,2896.96 2653.81,2896.96
  region net VBAT: 2218.77,1833.02 2179.4,1833.02 2189.09,1821.94 2209.09,1821.94
  region net VBAT: 2207.29,1856.64 2230.37,1847.04 2231.51,1861.29 2220.91,1864.83
  region net GND: 2179.4,1906.64 2218.77,1906.64 2209.09,1936.64 2189.09,1936.64
  region net GND: 2179.4,1883.02 2179.4,1906.64 2149.4,1904.83 2149.4,1884.83
  region net GND: 2218.77,1933.02 2179.4,1933.02 2189.09,1903.02 2209.09,1903.02
  region net U6_4: 2219.8,2006.6 2217.74,1983.02 2232.9,1974.76 2244.96,1990.99
  region net U6_4: 1968.67,1833.02 1932.46,1849.8 1915.92,1830.91 1933.24,1819.95
  region net GND: 1982.55,1883.02 1982.55,1906.64 2012.55,1904.83 2012.55,1884.83
  region net U6_2: 1943.18,1933.02 1943.18,1956.64 1913.18,1954.83 1913.18,1934.83
  region net GND: 1943.18,1983.02 1943.18,2006.64 1918.47,2004.83 1918.47,1984.83
  region net GND: 1581.53,1810.79 1605.16,1810.79 1603.35,1815.11 1583.35,1815.11
  region net GND: 1605.16,1771.42 1605.16,1810.79 1626.43,1801.11 1626.43,1781.11
  region net GND: 1605.16,1771.42 1581.53,1771.42 1583.34,1741.42 1603.34,1741.42
  region net GND: 1605.16,2056.87 1581.53,2056.87 1583.35,2026.87 1603.35,2026.87
  region net GND: 1612.2,2094.93 1598.11,2058.17 1629.25,2055.59 1637.09,2076.03
  region net GND: 2158.6,2400.18 2112.54,2400.18 2125.98,2377.83 2145.98,2377.96
  region net GND: 2112.54,2419.08 2158.6,2419.08 2145.58,2441.13 2125.58,2441.13
  region net GND: 2158.6,2431.68 2112.54,2431.68 2125.58,2409.63 2145.58,2409.63
  region net SDA: 2106.8,2465.13 2106.8,2480.13 2100.78,2475.63 2100.78,2469.63
  region net SCL: 2106.95,2496.51 2106.65,2511.51 2097.74,2506.83 2097.86,2500.83
  region net BEEP: 2293.67,2707.26 2274.77,2707.26 2279.22,2719.58 2289.22,2719.58
  region net LED: 2386.22,2713.01 2371.22,2713.01 2375.72,2722.01 2381.72,2722.01
  region net +3.3V: 2419.62,2661.2 2400.73,2661.2 2405.18,2646.2 2415.18,2646.2
  region net +3.3V: 2417.68,2713.01 2402.68,2713.01 2407.18,2722.01 2413.18,2722.01
  region net +3.3V: 2419.62,2706.18 2419.62,2681.18 2434.62,2701.61 2434.62,2715.75
  region net ADC_IN: 2493.15,2465.09 2493.15,2480.09 2502.15,2475.59 2502.15,2469.59
  region net RXD: 2493.15,2402.13 2493.15,2417.13 2502.15,2412.63 2502.15,2406.63
  region net TXD: 2419.62,2362.92 2419.62,2347.92 2428.62,2352.42 2428.62,2358.42
  region net U1_5: 2323.22,2326.65 2308.22,2326.65 2312.73,2317.65 2318.73,2317.65
  region net NRST: 2291.72,2326.65 2276.72,2326.65 2281.22,2317.65 2287.22,2317.65
  region net FOSC2: 2260.26,2326.68 2245.26,2326.62 2249.77,2322.62 2255.77,2322.64
  region net FOSC1: 2228.76,2326.68 2213.76,2326.62 2218.27,2322.12 2224.27,2322.14
  region net +3.3V: 2199.22,2378.46 2180.33,2378.46 2184.77,2393.46 2194.77,2393.46
  region net +3.3V: 2180.33,2332.33 2180.33,2357.33 2165.33,2349.83 2165.33,2339.83
  text "I-RING V1.0" at 2365.97,1762.83 h20
  text "2022-03-07" at 2436.97,1732.83 h20
  text "BY GL" at 2570.97,1703.83 h20
Bottom Layer:
  region net SDA: 1618.89,2529.25 1653.34,2494.79 1646.05,2517.71 1641.8,2521.95
  region net SCL: 1642.41,2372.47 1642.41,2421.19 1665.14,2399.83 1665.14,2393.83
  region net SCL: 1914.11,2569.02 1931.83,2569.02 1925.97,2560.75 1919.97,2560.75
  region net SDA: 1885.16,2510.97 1885.16,2528.69 1876.89,2522.83 1876.89,2516.83
  region net U6_4: 1975.76,1844.09 1963.23,1856.62 1968.27,1863.27 1982.42,1849.13
  region net U6_4: 2192.16,1985.97 2192.16,2003.69 2183.89,2004.83 2183.89,1984.83
  region net VBAT: 2517.57,2013.66 2504.87,2026.01 2509.49,2033.04 2524.48,2018.48
  region net +3.3V: 1983.69,2501.91 1998.83,2511.1 1991.97,2516.61 1981.97,2510.54
  region net +3.3V: 2004.17,2492.02 1986.46,2492.01 1990.32,2483.75 2000.32,2483.75
  region net +3.3V: 2004.17,2432.64 1986.46,2432.64 1990.32,2440.91 2000.32,2440.91
  region net +3.3V: 1978.11,2777.02 1995.83,2777.02 1991.97,2768.75 1981.97,2768.75
  region net GND: 2362.76,1979.09 2350.24,1991.62 2358.81,1994.74 2365.88,1987.67
  region net GND: 2342.12,1972.02 2359.83,1972.02 2360.98,1963.75 2340.98,1963.75
  region net GND: 2341.16,1851.97 2341.16,1869.69 2332.89,1870.83 2332.89,1850.83
  region net GND: 2358.74,1867.48 2341.16,1869.68 2340.98,1878.04 2360.98,1875.53
  region net GND: 2429.16,1995.53 2429.16,2013.25 2420.89,2009.39 2420.89,1999.39
  region net GND: 2448.76,2005.13 2436.23,1992.6 2444.81,1989.49 2451.88,1996.56
  region net GND: 2497.16,1967.97 2497.16,1985.69 2488.89,1981.83 2488.89,1971.83
  region net GND: 2516.76,1977.57 2504.23,1965.04 2512.81,1961.92 2519.88,1968.99
  region net GND: 2657.12,1951.64 2674.83,1951.64 2670.98,1959.91 2660.98,1959.91
  region net GND: 2658.17,1934.97 2658.16,1952.69 2649.9,1948.83 2649.9,1938.83
  region net GND: 1661.71,2819.04 1649.19,2831.57 1646.07,2823 1653.14,2815.93
  region net GND: 1671.14,2836.85 1653.73,2840.16 1658.97,2847.58 1668.97,2845.68
  region net GND: 1627.12,2698.64 1644.83,2698.64 1640.98,2706.91 1630.98,2706.91
  region net GND: 1647.76,2690.09 1635.24,2702.62 1643.81,2705.74 1650.88,2698.66
  region net GND: 1795.16,2694.97 1795.16,2712.69 1786.89,2708.83 1786.89,2698.83
  region net GND: 1814.76,2703.09 1802.23,2715.62 1810.81,2718.74 1817.88,2711.67
  region net GND: 1926.45,2806.33 1925.34,2824.3 1933.97,2820.83 1934.59,2810.83
  region net GND: 1916.64,2802.9 1906.31,2817.64 1901.68,2809.61 1907.51,2801.29
  region net GND: 1926.45,2806.33 1925.34,2824.3 1933.97,2820.83 1934.59,2810.83
  region net GND: 1916.64,2802.9 1906.31,2817.64 1901.68,2809.61 1907.51,2801.29
  region net GND: 2675.79,2134.98 2658.21,2137.18 2660.98,2128.5 2670.98,2127.25
  region net GND: 2427.12,2209.64 2444.83,2209.64 2440.98,2217.91 2430.98,2217.91
  region net GND: 2427.12,2209.64 2444.83,2209.64 2440.98,2217.91 2430.98,2217.91
  region net GND: 2289.71,2192.04 2277.19,2204.57 2274.07,2195.99 2281.14,2188.92
  region net GND: 2044.2,2344.09 2031.68,2356.62 2040.25,2359.74 2047.32,2352.66
  region net GND: 2024.6,2335.97 2024.6,2353.69 2016.34,2349.83 2016.34,2339.83
  region net GND: 2136.72,2389.62 2124.19,2377.09 2121.07,2385.66 2128.14,2392.74
  region net GND: 2128.16,2368.97 2128.16,2386.69 2119.9,2382.83 2119.9,2372.83
  region net GND: 2110.23,2100.97 2110.23,2118.69 2118.5,2114.83 2118.5,2104.83
  region net GND: 2020.29,2100.5 2019.19,2118.18 2011.17,2113.83 2011.8,2103.83
  region net GND: 2465.72,2618.04 2453.19,2630.57 2450.07,2621.99 2457.14,2614.92
  region net GND: 2472.79,2620.97 2472.79,2638.69 2481.05,2634.83 2481.05,2624.83
  region net SWDIO: 2228.79,2673.97 2228.79,2691.69 2237.06,2685.83 2237.06,2679.83
  region net SWCLK: 2200.76,2682.09 2188.23,2694.62 2198.22,2696.32 2202.47,2692.08
  region net SWDIO: 2511.88,2739.36 2499.35,2751.89 2497.65,2741.91 2501.89,2737.66
  region net SWCLK: 2503.33,2781.66 2503.33,2799.38 2495.06,2793.53 2495.06,2787.53
  region net +3.3V: 1840.78,2619.05 1827.72,2607.09 1836.14,2603.59 1843.52,2610.35
  region net +3.3V: 1893.71,2542.04 1881.19,2554.57 1879.44,2547.37 1886.51,2540.3
  region net +3.3V: 1893.71,2565.62 1881.19,2553.09 1878.07,2561.67 1885.14,2568.74
  region net +3.3V: 2530.37,2533.13 2529.16,2515.46 2537.81,2520.73 2538.22,2526.73
  region net GND: 1851.33,2261.18 1833.65,2260.08 1836.98,2268.57 1846.98,2269.19
  region net GND: 1851.33,2244.48 1833.65,2245.58 1836.98,2237.09 1846.98,2236.47
  region net +3.3V: 1743.79,2534.97 1743.79,2552.69 1752.06,2548.83 1752.06,2538.83
  region net +3.3V: 1736.72,2555.62 1724.19,2543.09 1721.07,2551.67 1728.14,2558.74
  region net GND: 1655.12,2880.02 1672.83,2880.02 1668.97,2871.75 1658.97,2871.75
  region net +3.3V: 1712.12,2649.02 1729.83,2649.02 1725.98,2640.75 1715.98,2640.75
  region net GND: 2522.96,2830.67 2510.44,2818.14 2519.01,2815.02 2526.08,2822.09
  region net GND: 2099.76,1895.57 2087.23,1883.04 2092.27,1876.39 2106.41,1890.53
  region net Q1_3: 2074.78,2646.97 2074.78,2664.69 2083.05,2658.83 2083.05,2652.83
  region net GND: 2197.71,2772.96 2185.18,2760.43 2182.07,2769 2189.14,2776.08
  region net VBAT: 2526,2196.58 2508.28,2196.58 2514.14,2204.85 2520.14,2204.85
  region net VBAT: 2525.99,2180.95 2508.27,2180.97 2509.62,2172.7 2524.62,2172.68
  region net VBAT: 2620.64,2417.15 2603.02,2418.97 2607.98,2410.15 2613.98,2409.53
  region net Q1_3: 2451.72,2651.04 2439.19,2663.57 2437.48,2653.58 2441.73,2649.34
  region net +3.3V: 2590.12,2631.02 2607.83,2631.02 2601.97,2622.75 2595.97,2622.75
  region net +3.3V: 2546.84,2543.41 2559.51,2535.39 2563.13,2543.75 2557.94,2547.04

## Silkscreen, mask and mechanical layers (free items; w line width, h text height)
Document:
  lines w10: 1799.97,2955.83 2488.95,2955.83 ccw(c2449.58,2995.2) 2488.95,3034.57 1799.97,3034.57 ; 1799.98,2955.83 cw(c1839.35,2995.2) 1799.98,3034.57 ; 1808.97,1612.83 2496.69,1612.83 2497.95,1614.09 ccw(c2458.58,1653.46) 2497.95,1692.83 2370.55,1692.85 ccw(c2333.36,1695.04) 2335.55,1732.22 1889.92,1732.2 ccw(c1888.81,1691.73) 1848.34,1692.83 1808.97,1692.83 ccw(c1848.34,1653.46) 1808.97,1614.09